# Altium PCB NearFieldProbeSet.PcbDoc (part 2 of 3)
Units mm, origin at the board's own origin, x right, y up, seen from the top; angles counter-clockwise.
Board outline 100 x 100 mm, 6 copper layers (Top Layer, Int1, Int2 (SIG), Int3, Int4, Bottom Layer), stack 1.538 mm thick; 8 components, 12 nets, 232 pads, 4318 vias.
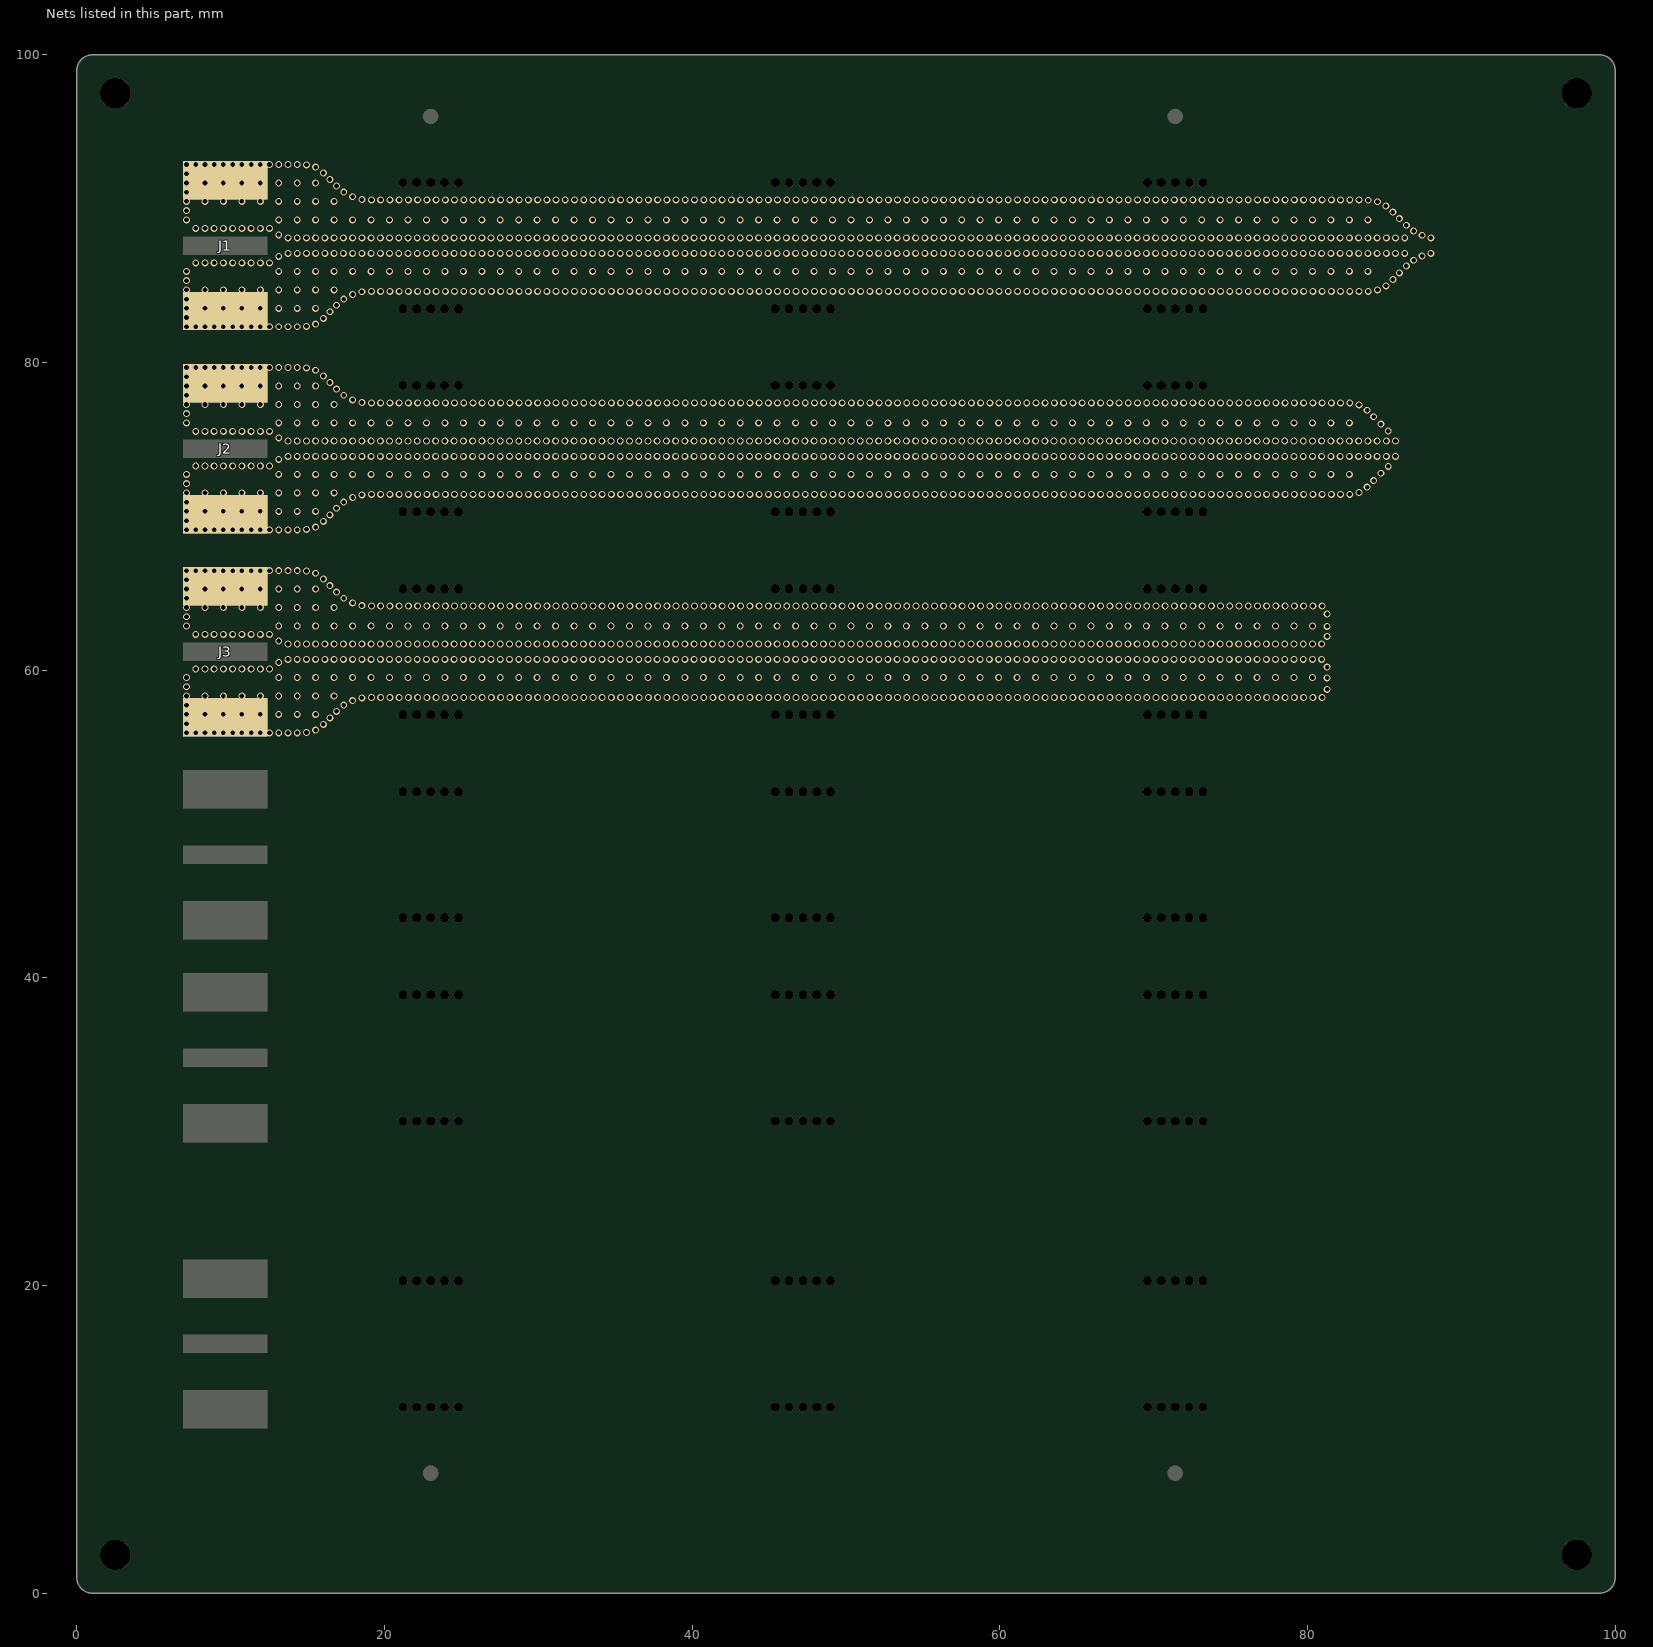
[diagram p6: the nets of this part, all layers, seen from the top]

## Via types
v1: diameter 0.45, hole 0.3, Top Layer to Bottom Layer, tented both sides, 4318 vias

## Nets (pads, with @x,y where several pads share a name; then routed paths per layer and width w, separated by ;. In a path a pad name is that pad's centre, name@x,y a point inside that pad or via, vN(x,y) a via of type N, cw(c..) or ccw(c..) an arc to the next point about the centre after c; other vN are vias at no path point)
GND1: J1.2 J1.3 J1.4 J1.5
  other v1: 7.125,82.325 7.725,82.325 8.325,82.325 8.925,82.325 9.525,82.325 10.125,82.325 10.725,82.325 11.325,82.325 11.925,82.325 12.525,82.325 13.125,82.325 13.725,82.325 14.325,82.325 14.925,82.35 15.525,82.5 16.025,82.875 7.125,82.925 16.45,83.3 7.125,83.525 8.325,83.525 9.525,83.525 10.725,83.525 11.925,83.525 13.125,83.525 14.325,83.525 15.525,83.525 16.875,83.725 7.125,84.125 17.35,84.125 17.925,84.425 18.525,84.6 19.15,84.625 19.75,84.625 20.35,84.625 20.95,84.625 21.55,84.625 22.15,84.625 22.75,84.625 23.35,84.625 23.95,84.625 24.55,84.625 25.15,84.625 25.75,84.625 26.35,84.625 26.95,84.625 27.55,84.625 28.15,84.625 28.75,84.625 29.35,84.625 29.95,84.625 30.55,84.625 31.15,84.625 31.75,84.625 32.35,84.625 32.95,84.625 33.55,84.625 34.15,84.625 34.75,84.625 35.35,84.625 35.95,84.625 36.55,84.625 37.15,84.625 37.75,84.625 38.35,84.625 38.95,84.625 39.55,84.625 40.15,84.625 40.75,84.625 41.35,84.625 41.95,84.625 42.55,84.625 43.15,84.625 43.75,84.625 44.35,84.625 44.95,84.625 45.55,84.625 46.15,84.625 46.75,84.625 47.35,84.625 47.95,84.625 48.55,84.625 49.15,84.625 49.75,84.625 50.35,84.625 50.95,84.625 51.55,84.625 52.15,84.625 52.75,84.625 53.35,84.625 53.95,84.625 54.55,84.625 55.15,84.625 55.75,84.625 56.35,84.625 56.95,84.625 57.55,84.625 58.15,84.625 58.75,84.625 59.35,84.625 59.95,84.625 60.55,84.625 61.15,84.625 61.75,84.625 62.35,84.625 62.95,84.625 63.55,84.625 64.15,84.625 64.75,84.625 65.35,84.625 65.95,84.625 66.55,84.625 67.15,84.625 67.75,84.625 68.35,84.625 68.95,84.625 69.55,84.625 70.15,84.625 70.75,84.625 71.35,84.625 71.95,84.625 72.55,84.625 73.15,84.625 73.75,84.625 74.35,84.625 74.95,84.625 75.55,84.625 76.15,84.625 76.75,84.625 77.35,84.625 77.95,84.625 78.55,84.625 79.15,84.625 79.75,84.625 80.35,84.625 80.95,84.625 81.55,84.625 82.15,84.625 82.75,84.625 83.35,84.625 83.95,84.625 7.125,84.725 8.325,84.725 9.525,84.725 10.725,84.725 11.925,84.725 13.125,84.725 14.325,84.725 15.525,84.725 16.725,84.725 84.55,84.725 85.105,84.98 7.125,85.325 85.55,85.4 85.975,85.825 7.125,85.925 13.125,85.925 14.325,85.925 15.525,85.925 16.725,85.925 17.925,85.925 19.125,85.925 20.325,85.925 21.525,85.925 22.725,85.925 23.925,85.925 25.125,85.925 26.325,85.925 27.525,85.925 28.725,85.925 29.925,85.925 31.125,85.925 32.325,85.925 33.525,85.925 34.725,85.925 35.925,85.925 37.125,85.925 38.325,85.925 39.525,85.925 40.725,85.925 41.925,85.925 43.125,85.925 44.325,85.925 45.525,85.925 46.725,85.925 47.925,85.925 49.125,85.925 50.325,85.925 51.525,85.925 52.725,85.925 53.925,85.925 55.125,85.925 56.325,85.925 57.525,85.925 58.725,85.925 59.925,85.925 61.125,85.925 62.325,85.925 63.525,85.925 64.725,85.925 65.925,85.925 67.125,85.925 68.325,85.925 69.525,85.925 70.725,85.925 71.925,85.925 73.125,85.925 74.325,85.925 75.525,85.925 76.725,85.925 77.925,85.925 79.125,85.925 80.325,85.925 81.525,85.925 82.725,85.925 83.925,85.925 86.425,86.275 7.725,86.475 8.325,86.475 8.925,86.475 9.525,86.475 10.125,86.475 10.725,86.475 11.325,86.475 11.925,86.475 12.525,86.475 86.9,86.65 13.125,86.9 87.45,86.925 13.725,87.1 14.325,87.1 14.925,87.1 15.525,87.1 16.125,87.1 16.725,87.1 17.325,87.1 17.925,87.1 18.525,87.1 19.125,87.1 19.725,87.1 20.325,87.1 20.925,87.1 21.525,87.1 22.125,87.1 22.725,87.1 23.325,87.1 23.925,87.1 24.525,87.1 25.125,87.1 25.725,87.1 26.325,87.1 26.925,87.1 27.525,87.1 28.125,87.1 28.725,87.1 29.325,87.1 29.925,87.1 30.525,87.1 31.125,87.1 31.725,87.1 32.325,87.1 32.925,87.1 33.525,87.1 34.125,87.1 34.725,87.1 35.325,87.1 35.925,87.1 36.525,87.1 37.125,87.1 37.725,87.1 38.325,87.1 38.925,87.1 39.525,87.1 40.125,87.1 40.725,87.1 41.325,87.1 41.925,87.1 42.525,87.1 43.125,87.1 43.725,87.1 44.325,87.1 44.925,87.1 45.525,87.1 46.125,87.1 46.725,87.1 47.325,87.1 47.925,87.1 48.525,87.1 49.125,87.1 49.725,87.1 50.325,87.1 50.925,87.1 51.525,87.1 52.125,87.1 52.725,87.1 53.325,87.1 53.925,87.1 54.525,87.1 55.125,87.1 55.725,87.1 56.325,87.1 56.925,87.1 57.525,87.1 58.125,87.1 58.725,87.1 59.325,87.1 59.925,87.1 60.525,87.1 61.125,87.1 61.725,87.1 62.325,87.1 62.925,87.1 63.525,87.1 64.125,87.1 64.725,87.1 65.325,87.1 65.925,87.1 66.525,87.1 67.125,87.1 67.725,87.1 68.325,87.1 68.925,87.1 69.525,87.1 70.125,87.1 70.725,87.1 71.325,87.1 71.925,87.1 72.525,87.1 73.125,87.1 73.725,87.1 74.325,87.1 74.925,87.1 75.525,87.1 76.125,87.1 76.725,87.1 77.325,87.1 77.925,87.1 78.525,87.1 79.125,87.1 79.725,87.1 80.325,87.1 80.925,87.1 81.525,87.1 82.125,87.1 82.725,87.1 83.325,87.1 83.925,87.1 84.525,87.1 85.125,87.1 85.725,87.1 86.325,87.1 88.025,87.1 13.725,88.1 14.325,88.1 14.925,88.1 15.525,88.1 16.125,88.1 16.725,88.1 17.325,88.1 17.925,88.1 18.525,88.1 19.125,88.1 19.725,88.1 20.325,88.1 20.925,88.1 21.525,88.1 22.125,88.1 22.725,88.1 23.325,88.1 23.925,88.1 24.525,88.1 25.125,88.1 25.725,88.1 26.325,88.1 26.925,88.1 27.525,88.1 28.125,88.1 28.725,88.1 29.325,88.1 29.925,88.1 30.525,88.1 31.125,88.1 31.725,88.1 32.325,88.1 32.925,88.1 33.525,88.1 34.125,88.1 34.725,88.1 35.325,88.1 35.925,88.1 36.525,88.1 37.125,88.1 37.725,88.1 38.325,88.1 38.925,88.1 39.525,88.1 40.125,88.1 40.725,88.1 41.325,88.1 41.925,88.1 42.525,88.1 43.125,88.1 43.725,88.1 44.325,88.1 44.925,88.1 45.525,88.1 46.125,88.1 46.725,88.1 47.325,88.1 47.925,88.1 48.525,88.1 49.125,88.1 49.725,88.1 50.325,88.1 50.925,88.1 51.525,88.1 52.125,88.1 52.725,88.1 53.325,88.1 53.925,88.1 54.525,88.1 55.125,88.1 55.725,88.1 56.325,88.1 56.925,88.1 57.525,88.1 58.125,88.1 58.725,88.1 59.325,88.1 59.925,88.1 60.525,88.1 61.125,88.1 61.725,88.1 62.325,88.1 62.925,88.1 63.525,88.1 64.125,88.1 64.725,88.1 65.325,88.1 65.925,88.1 66.525,88.1 67.125,88.1 67.725,88.1 68.325,88.1 68.925,88.1 69.525,88.1 70.125,88.1 70.725,88.1 71.325,88.1 71.925,88.1 72.525,88.1 73.125,88.1 73.725,88.1 74.325,88.1 74.925,88.1 75.525,88.1 76.125,88.1 76.725,88.1 77.325,88.1 77.925,88.1 78.525,88.1 79.125,88.1 79.725,88.1 80.325,88.1 80.925,88.1 81.525,88.1 82.125,88.1 82.725,88.1 83.325,88.1 83.925,88.1 84.525,88.1 85.125,88.1 85.725,88.1 86.325,88.1 88.025,88.1 87.45,88.275 13.125,88.3 86.9,88.55 7.725,88.725 8.325,88.725 8.925,88.725 9.525,88.725 10.125,88.725 10.725,88.725 11.325,88.725 11.925,88.725 12.525,88.725 86.425,88.925 7.125,89.275 13.125,89.275 14.325,89.275 15.525,89.275 16.725,89.275 17.925,89.275 19.125,89.275 20.325,89.275 21.525,89.275 22.725,89.275 23.925,89.275 25.125,89.275 26.325,89.275 27.525,89.275 28.725,89.275 29.925,89.275 31.125,89.275 32.325,89.275 33.525,89.275 34.725,89.275 35.925,89.275 37.125,89.275 38.325,89.275 39.525,89.275 40.725,89.275 41.925,89.275 43.125,89.275 44.325,89.275 45.525,89.275 46.725,89.275 47.925,89.275 49.125,89.275 50.325,89.275 51.525,89.275 52.725,89.275 53.925,89.275 55.125,89.275 56.325,89.275 57.525,89.275 58.725,89.275 59.925,89.275 61.125,89.275 62.325,89.275 63.525,89.275 64.725,89.275 65.925,89.275 67.125,89.275 68.325,89.275 69.525,89.275 70.725,89.275 71.925,89.275 73.125,89.275 74.325,89.275 75.525,89.275 76.725,89.275 77.925,89.275 79.125,89.275 80.325,89.275 81.525,89.275 82.725,89.275 83.925,89.275 85.975,89.35 85.55,89.775 7.125,89.875 85.1,90.175 84.55,90.45 7.125,90.475 8.325,90.475 9.525,90.475 10.725,90.475 11.925,90.475 13.125,90.475 14.325,90.475 15.525,90.475 16.725,90.475 83.95,90.55 19.15,90.575 19.75,90.575 20.35,90.575 20.95,90.575 21.55,90.575 22.15,90.575 22.75,90.575 23.35,90.575 23.95,90.575 24.55,90.575 25.15,90.575 25.75,90.575 26.35,90.575 26.95,90.575 27.55,90.575 28.15,90.575 28.75,90.575 29.35,90.575 29.95,90.575 30.55,90.575 31.15,90.575 31.75,90.575 32.35,90.575 32.95,90.575 33.55,90.575 34.15,90.575 34.75,90.575 35.35,90.575 35.95,90.575 36.55,90.575 37.15,90.575 37.75,90.575 38.35,90.575 38.95,90.575 39.55,90.575 40.15,90.575 40.75,90.575 41.35,90.575 41.95,90.575 42.55,90.575 43.15,90.575 43.75,90.575 44.35,90.575 44.95,90.575 45.55,90.575 46.15,90.575 46.75,90.575 47.35,90.575 47.95,90.575 48.55,90.575 49.15,90.575 49.75,90.575 50.35,90.575 50.95,90.575 51.55,90.575 52.15,90.575 52.75,90.575 53.35,90.575 53.95,90.575 54.55,90.575 55.15,90.575 55.75,90.575 56.35,90.575 56.95,90.575 57.55,90.575 58.15,90.575 58.75,90.575 59.35,90.575 59.95,90.575 60.55,90.575 61.15,90.575 61.75,90.575 62.35,90.575 62.95,90.575 63.55,90.575 64.15,90.575 64.75,90.575 65.35,90.575 65.95,90.575 66.55,90.575 67.15,90.575 67.75,90.575 68.35,90.575 68.95,90.575 69.55,90.575 70.15,90.575 70.75,90.575 71.35,90.575 71.95,90.575 72.55,90.575 73.15,90.575 73.75,90.575 74.35,90.575 74.95,90.575 75.55,90.575 76.15,90.575 76.75,90.575 77.35,90.575 77.95,90.575 78.55,90.575 79.15,90.575 79.75,90.575 80.35,90.575 80.95,90.575 81.55,90.575 82.15,90.575 82.75,90.575 83.35,90.575 18.525,90.6 17.925,90.775 7.125,91.075 17.35,91.075 16.875,91.475 7.125,91.675 8.325,91.675 9.525,91.675 10.725,91.675 11.925,91.675 13.125,91.675 14.325,91.675 15.525,91.675 16.45,91.9 7.125,92.275 16.025,92.325 15.525,92.7 14.925,92.85 7.125,92.875 7.725,92.875 8.325,92.875 8.925,92.875 9.525,92.875 10.125,92.875 10.725,92.875 11.325,92.875 11.925,92.875 12.525,92.875 13.125,92.875 13.725,92.875 14.325,92.875
GND2: J2.2 J2.3 J2.4 J2.5
  other v1: 7.125,69.125 7.725,69.125 8.325,69.125 8.925,69.125 9.525,69.125 10.125,69.125 10.725,69.125 11.325,69.125 11.925,69.125 12.525,69.125 13.125,69.125 13.725,69.125 14.325,69.125 14.925,69.15 15.525,69.3 16.025,69.675 7.125,69.725 16.45,70.1 7.125,70.325 8.325,70.325 9.525,70.325 10.725,70.325 11.925,70.325 13.125,70.325 14.325,70.325 15.525,70.325 16.875,70.525 7.125,70.925 17.35,70.925 17.925,71.225 18.525,71.4 19.15,71.425 19.75,71.425 20.35,71.425 20.95,71.425 21.55,71.425 22.15,71.425 22.75,71.425 23.35,71.425 23.95,71.425 24.55,71.425 25.15,71.425 25.75,71.425 26.35,71.425 26.95,71.425 27.55,71.425 28.15,71.425 28.75,71.425 29.35,71.425 29.95,71.425 30.55,71.425 31.15,71.425 31.75,71.425 32.35,71.425 32.95,71.425 33.55,71.425 34.15,71.425 34.75,71.425 35.35,71.425 35.95,71.425 36.55,71.425 37.15,71.425 37.75,71.425 38.35,71.425 38.95,71.425 39.55,71.425 40.15,71.425 40.75,71.425 41.35,71.425 41.95,71.425 42.55,71.425 43.15,71.425 43.75,71.425 44.35,71.425 44.95,71.425 45.55,71.425 46.15,71.425 46.75,71.425 47.35,71.425 47.95,71.425 48.55,71.425 49.15,71.425 49.75,71.425 50.35,71.425 50.95,71.425 51.55,71.425 52.15,71.425 52.75,71.425 53.35,71.425 53.95,71.425 54.55,71.425 55.15,71.425 55.75,71.425 56.35,71.425 56.95,71.425 57.55,71.425 58.15,71.425 58.75,71.425 59.35,71.425 59.95,71.425 60.55,71.425 61.15,71.425 61.75,71.425 62.35,71.425 62.95,71.425 63.55,71.425 64.15,71.425 64.75,71.425 65.35,71.425 65.95,71.425 66.55,71.425 67.15,71.425 67.75,71.425 68.35,71.425 68.95,71.425 69.55,71.425 70.15,71.425 70.75,71.425 71.35,71.425 71.95,71.425 72.55,71.425 73.15,71.425 73.75,71.425 74.35,71.425 74.95,71.425 75.55,71.425 76.15,71.425 76.75,71.425 77.35,71.425 77.95,71.425 78.55,71.425 79.15,71.425 79.75,71.425 80.35,71.425 80.95,71.425 81.55,71.425 82.15,71.425 82.75,71.425 7.125,71.525 8.325,71.525 9.525,71.525 10.725,71.525 11.925,71.525 13.125,71.525 14.325,71.525 15.525,71.525 16.725,71.525 83.35,71.55 83.875,71.9 7.125,72.125 84.3,72.325 7.125,72.725 13.125,72.725 14.325,72.725 15.525,72.725 16.725,72.725 17.925,72.725 19.125,72.725 20.325,72.725 21.525,72.725 22.725,72.725 23.925,72.725 25.125,72.725 26.325,72.725 27.525,72.725 28.725,72.725 29.925,72.725 31.125,72.725 32.325,72.725 33.525,72.725 34.725,72.725 35.925,72.725 37.125,72.725 38.325,72.725 39.525,72.725 40.725,72.725 41.925,72.725 43.125,72.725 44.325,72.725 45.525,72.725 46.725,72.725 47.925,72.725 49.125,72.725 50.325,72.725 51.525,72.725 52.725,72.725 53.925,72.725 55.125,72.725 56.325,72.725 57.525,72.725 58.725,72.725 59.925,72.725 61.125,72.725 62.325,72.725 63.525,72.725 64.725,72.725 65.925,72.725 67.125,72.725 68.325,72.725 69.525,72.725 70.725,72.725 71.925,72.725 73.125,72.725 74.325,72.725 75.525,72.725 76.725,72.725 77.925,72.725 79.125,72.725 80.325,72.725 81.525,72.725 82.725,72.725 84.775,72.8 85.25,73.25 7.725,73.275 8.325,73.275 8.925,73.275 9.525,73.275 10.125,73.275 10.725,73.275 11.325,73.275 11.925,73.275 12.525,73.275 13.125,73.7 13.725,73.9 14.325,73.9 14.925,73.9 15.525,73.9 16.125,73.9 16.725,73.9 17.325,73.9 17.925,73.9 18.525,73.9 19.125,73.9 19.725,73.9 20.325,73.9 20.925,73.9 21.525,73.9 22.125,73.9 22.725,73.9 23.325,73.9 23.925,73.9 24.525,73.9 25.125,73.9 25.725,73.9 26.325,73.9 26.925,73.9 27.525,73.9 28.125,73.9 28.725,73.9 29.325,73.9 29.925,73.9 30.525,73.9 31.125,73.9 31.725,73.9 32.325,73.9 32.925,73.9 33.525,73.9 34.125,73.9 34.725,73.9 35.325,73.9 35.925,73.9 36.525,73.9 37.125,73.9 37.725,73.9 38.325,73.9 38.925,73.9 39.525,73.9 40.125,73.9 40.725,73.9 41.325,73.9 41.925,73.9 42.525,73.9 43.125,73.9 43.725,73.9 44.325,73.9 44.925,73.9 45.525,73.9 46.125,73.9 46.725,73.9 47.325,73.9 47.925,73.9 48.525,73.9 49.125,73.9 49.725,73.9 50.325,73.9 50.925,73.9 51.525,73.9 52.125,73.9 52.725,73.9 53.325,73.9 53.925,73.9 54.525,73.9 55.125,73.9 55.725,73.9 56.325,73.9 56.925,73.9 57.525,73.9 58.125,73.9 58.725,73.9 59.325,73.9 59.925,73.9 60.525,73.9 61.125,73.9 61.725,73.9 62.325,73.9 62.925,73.9 63.525,73.9 64.125,73.9 64.725,73.9 65.325,73.9 65.925,73.9 66.525,73.9 67.125,73.9 67.725,73.9 68.325,73.9 68.925,73.9 69.525,73.9 70.125,73.9 70.725,73.9 71.325,73.9 71.925,73.9 72.525,73.9 73.125,73.9 73.725,73.9 74.325,73.9 74.925,73.9 75.525,73.9 76.125,73.9 76.725,73.9 77.325,73.9 77.925,73.9 78.525,73.9 79.125,73.9 79.725,73.9 80.325,73.9 80.925,73.9 81.525,73.9 82.125,73.9 82.725,73.9 83.325,73.9 83.925,73.9 84.525,73.9 85.125,73.9 85.725,73.9 13.725,74.9 14.325,74.9 14.925,74.9 15.525,74.9 16.125,74.9 16.725,74.9 17.325,74.9 17.925,74.9 18.525,74.9 19.125,74.9 19.725,74.9 20.325,74.9 20.925,74.9 21.525,74.9 22.125,74.9 22.725,74.9 23.325,74.9 23.925,74.9 24.525,74.9 25.125,74.9 25.725,74.9 26.325,74.9 26.925,74.9 27.525,74.9 28.125,74.9 28.725,74.9 29.325,74.9 29.925,74.9 30.525,74.9 31.125,74.9 31.725,74.9 32.325,74.9 32.925,74.9 33.525,74.9 34.125,74.9 34.725,74.9 35.325,74.9 35.925,74.9 36.525,74.9 37.125,74.9 37.725,74.9 38.325,74.9 38.925,74.9 39.525,74.9 40.125,74.9 40.725,74.9 41.325,74.9 41.925,74.9 42.525,74.9 43.125,74.9 43.725,74.9 44.325,74.9 44.925,74.9 45.525,74.9 46.125,74.9 46.725,74.9 47.325,74.9 47.925,74.9 48.525,74.9 49.125,74.9 49.725,74.9 50.325,74.9 50.925,74.9 51.525,74.9 52.125,74.9 52.725,74.9 53.325,74.9 53.925,74.9 54.525,74.9 55.125,74.9 55.725,74.9 56.325,74.9 56.925,74.9 57.525,74.9 58.125,74.9 58.725,74.9 59.325,74.9 59.925,74.9 60.525,74.9 61.125,74.9 61.725,74.9 62.325,74.9 62.925,74.9 63.525,74.9 64.125,74.9 64.725,74.9 65.325,74.9 65.925,74.9 66.525,74.9 67.125,74.9 67.725,74.9 68.325,74.9 68.925,74.9 69.525,74.9 70.125,74.9 70.725,74.9 71.325,74.9 71.925,74.9 72.525,74.9 73.125,74.9 73.725,74.9 74.325,74.9 74.925,74.9 75.525,74.9 76.125,74.9 76.725,74.9 77.325,74.9 77.925,74.9 78.525,74.9 79.125,74.9 79.725,74.9 80.325,74.9 80.925,74.9 81.525,74.9 82.125,74.9 82.725,74.9 83.325,74.9 83.925,74.9 84.525,74.9 85.125,74.9 85.725,74.9 13.125,75.1 7.725,75.525 8.325,75.525 8.925,75.525 9.525,75.525 10.125,75.525 10.725,75.525 11.325,75.525 11.925,75.525 12.525,75.525 85.25,75.55 84.775,76 7.125,76.075 13.125,76.075 14.325,76.075 15.525,76.075 16.725,76.075 17.925,76.075 19.125,76.075 20.325,76.075 21.525,76.075 22.725,76.075 23.925,76.075 25.125,76.075 26.325,76.075 27.525,76.075 28.725,76.075 29.925,76.075 31.125,76.075 32.325,76.075 33.525,76.075 34.725,76.075 35.925,76.075 37.125,76.075 38.325,76.075 39.525,76.075 40.725,76.075 41.925,76.075 43.125,76.075 44.325,76.075 45.525,76.075 46.725,76.075 47.925,76.075 49.125,76.075 50.325,76.075 51.525,76.075 52.725,76.075 53.925,76.075 55.125,76.075 56.325,76.075 57.525,76.075 58.725,76.075 59.925,76.075 61.125,76.075 62.325,76.075 63.525,76.075 64.725,76.075 65.925,76.075 67.125,76.075 68.325,76.075 69.525,76.075 70.725,76.075 71.925,76.075 73.125,76.075 74.325,76.075 75.525,76.075 76.725,76.075 77.925,76.075 79.125,76.075 80.325,76.075 81.525,76.075 82.725,76.075 84.3,76.475 7.125,76.675 83.875,76.9 83.35,77.25 7.125,77.275 8.325,77.275 9.525,77.275 10.725,77.275 11.925,77.275 13.125,77.275 14.325,77.275 15.525,77.275 16.725,77.275 19.15,77.375 19.75,77.375 20.35,77.375 20.95,77.375 21.55,77.375 22.15,77.375 22.75,77.375 23.35,77.375 23.95,77.375 24.55,77.375 25.15,77.375 25.75,77.375 26.35,77.375 26.95,77.375 27.55,77.375 28.15,77.375 28.75,77.375 29.35,77.375 29.95,77.375 30.55,77.375 31.15,77.375 31.75,77.375 32.35,77.375 32.95,77.375 33.55,77.375 34.15,77.375 34.75,77.375 35.35,77.375 35.95,77.375 36.55,77.375 37.15,77.375 37.75,77.375 38.35,77.375 38.95,77.375 39.55,77.375 40.15,77.375 40.75,77.375 41.35,77.375 41.95,77.375 42.55,77.375 43.15,77.375 43.75,77.375 44.35,77.375 44.95,77.375 45.55,77.375 46.15,77.375 46.75,77.375 47.35,77.375 47.95,77.375 48.55,77.375 49.15,77.375 49.75,77.375 50.35,77.375 50.95,77.375 51.55,77.375 52.15,77.375 52.75,77.375 53.35,77.375 53.95,77.375 54.55,77.375 55.15,77.375 55.75,77.375 56.35,77.375 56.95,77.375 57.55,77.375 58.15,77.375 58.75,77.375 59.35,77.375 59.95,77.375 60.55,77.375 61.15,77.375 61.75,77.375 62.35,77.375 62.95,77.375 63.55,77.375 64.15,77.375 64.75,77.375 65.35,77.375 65.95,77.375 66.55,77.375 67.15,77.375 67.75,77.375 68.35,77.375 68.95,77.375 69.55,77.375 70.15,77.375 70.75,77.375 71.35,77.375 71.95,77.375 72.55,77.375 73.15,77.375 73.75,77.375 74.35,77.375 74.95,77.375 75.55,77.375 76.15,77.375 76.75,77.375 77.35,77.375 77.95,77.375 78.55,77.375 79.15,77.375 79.75,77.375 80.35,77.375 80.95,77.375 81.55,77.375 82.15,77.375 82.75,77.375 18.525,77.4 17.925,77.575 7.125,77.875 17.35,77.875 16.875,78.275 7.125,78.475 8.325,78.475 9.525,78.475 10.725,78.475 11.925,78.475 13.125,78.475 14.325,78.475 15.525,78.475 16.45,78.7 7.125,79.075 16.025,79.125 15.525,79.5 14.925,79.65 7.125,79.675 7.725,79.675 8.325,79.675 8.925,79.675 9.525,79.675 10.125,79.675 10.725,79.675 11.325,79.675 11.925,79.675 12.525,79.675 13.125,79.675 13.725,79.675 14.325,79.675
GND3: J3.2 J3.3 J3.4 J3.5
  other v1: 7.125,55.925 7.725,55.925 8.325,55.925 8.925,55.925 9.525,55.925 10.125,55.925 10.725,55.925 11.325,55.925 11.925,55.925 12.525,55.925 13.125,55.925 13.725,55.925 14.325,55.925 14.925,55.95 15.525,56.1 16.025,56.475 7.125,56.525 16.45,56.9 7.125,57.125 8.325,57.125 9.525,57.125 10.725,57.125 11.925,57.125 13.125,57.125 14.325,57.125 15.525,57.125 16.875,57.325 7.125,57.725 17.35,57.725 17.925,58.025 18.525,58.2 19.15,58.225 19.75,58.225 20.35,58.225 20.95,58.225 21.55,58.225 22.15,58.225 22.75,58.225 23.35,58.225 23.95,58.225 24.55,58.225 25.15,58.225 25.75,58.225 26.35,58.225 26.95,58.225 27.55,58.225 28.15,58.225 28.75,58.225 29.35,58.225 29.95,58.225 30.55,58.225 31.15,58.225 31.75,58.225 32.35,58.225 32.95,58.225 33.55,58.225 34.15,58.225 34.75,58.225 35.35,58.225 35.95,58.225 36.55,58.225 37.15,58.225 37.75,58.225 38.35,58.225 38.95,58.225 39.55,58.225 40.15,58.225 40.75,58.225 41.35,58.225 41.95,58.225 42.55,58.225 43.15,58.225 43.75,58.225 44.35,58.225 44.95,58.225 45.55,58.225 46.15,58.225 46.75,58.225 47.35,58.225 47.95,58.225 48.55,58.225 49.15,58.225 49.75,58.225 50.35,58.225 50.95,58.225 51.55,58.225 52.15,58.225 52.75,58.225 53.35,58.225 53.95,58.225 54.55,58.225 55.15,58.225 55.75,58.225 56.35,58.225 56.95,58.225 57.55,58.225 58.15,58.225 58.75,58.225 59.35,58.225 59.95,58.225 60.55,58.225 61.15,58.225 61.75,58.225 62.35,58.225 62.95,58.225 63.55,58.225 64.15,58.225 64.75,58.225 65.35,58.225 65.95,58.225 66.55,58.225 67.15,58.225 67.75,58.225 68.35,58.225 68.95,58.225 69.55,58.225 70.15,58.225 70.75,58.225 71.35,58.225 71.95,58.225 72.55,58.225 73.15,58.225 73.75,58.225 74.35,58.225 74.95,58.225 75.55,58.225 76.15,58.225 76.75,58.225 77.35,58.225 77.95,58.225 78.55,58.225 79.15,58.225 79.75,58.225 80.35,58.225 80.95,58.225 7.125,58.325 8.325,58.325 9.525,58.325 10.725,58.325 11.925,58.325 13.125,58.325 14.325,58.325 15.525,58.325 16.725,58.325 81.275,58.75 7.125,58.925 81.275,59.5 7.125,59.525 13.125,59.525 14.325,59.525 15.525,59.525 16.725,59.525 17.925,59.525 19.125,59.525 20.325,59.525 21.525,59.525 22.725,59.525 23.925,59.525 25.125,59.525 26.325,59.525 27.525,59.525 28.725,59.525 29.925,59.525 31.125,59.525 32.325,59.525 33.525,59.525 34.725,59.525 35.925,59.525 37.125,59.525 38.325,59.525 39.525,59.525 40.725,59.525 41.925,59.525 43.125,59.525 44.325,59.525 45.525,59.525 46.725,59.525 47.925,59.525 49.125,59.525 50.325,59.525 51.525,59.525 52.725,59.525 53.925,59.525 55.125,59.525 56.325,59.525 57.525,59.525 58.725,59.525 59.925,59.525 61.125,59.525 62.325,59.525 63.525,59.525 64.725,59.525 65.925,59.525 67.125,59.525 68.325,59.525 69.525,59.525 70.725,59.525 71.925,59.525 73.125,59.525 74.325,59.525 75.525,59.525 76.725,59.525 77.925,59.525 79.125,59.525 80.325,59.525 7.725,60.075 8.325,60.075 8.925,60.075 9.525,60.075 10.125,60.075 10.725,60.075 11.325,60.075 11.925,60.075 12.525,60.075 81.275,60.2 13.125,60.5 13.725,60.7 14.325,60.7 14.925,60.7 15.525,60.7 16.125,60.7 16.725,60.7 17.325,60.7 17.925,60.7 18.525,60.7 19.125,60.7 19.725,60.7 20.325,60.7 20.925,60.7 21.525,60.7 22.125,60.7 22.725,60.7 23.325,60.7 23.925,60.7 24.525,60.7 25.125,60.7 25.725,60.7 26.325,60.7 26.925,60.7 27.525,60.7 28.125,60.7 28.725,60.7 29.325,60.7 29.925,60.7 30.525,60.7 31.125,60.7 31.725,60.7 32.325,60.7 32.925,60.7 33.525,60.7 34.125,60.7 34.725,60.7 35.325,60.7 35.925,60.7 36.525,60.7 37.125,60.7 37.725,60.7 38.325,60.7 38.925,60.7 39.525,60.7 40.125,60.7 40.725,60.7 41.325,60.7 41.925,60.7 42.525,60.7 43.125,60.7 43.725,60.7 44.325,60.7 44.925,60.7 45.525,60.7 46.125,60.7 46.725,60.7 47.325,60.7 47.925,60.7 48.525,60.7 49.125,60.7 49.725,60.7 50.325,60.7 50.925,60.7 51.525,60.7 52.125,60.7 52.725,60.7 53.325,60.7 53.925,60.7 54.525,60.7 55.125,60.7 55.725,60.7 56.325,60.7 56.925,60.7 57.525,60.7 58.125,60.7 58.725,60.7 59.325,60.7 59.925,60.7 60.525,60.7 61.125,60.7 61.725,60.7 62.325,60.7 62.925,60.7 63.525,60.7 64.125,60.7 64.725,60.7 65.325,60.7 65.925,60.7 66.525,60.7 67.125,60.7 67.725,60.7 68.325,60.7 68.925,60.7 69.525,60.7 70.125,60.7 70.725,60.7 71.325,60.7 71.925,60.7 72.525,60.7 73.125,60.7 73.725,60.7 74.325,60.7 74.925,60.7 75.525,60.7 76.125,60.7 76.725,60.7 77.325,60.7 77.925,60.7 78.525,60.7 79.125,60.7 79.725,60.7 80.325,60.7 80.925,60.7 13.725,61.7 14.325,61.7 14.925,61.7 15.525,61.7 16.125,61.7 16.725,61.7 17.325,61.7 17.925,61.7 18.525,61.7 19.125,61.7 19.725,61.7 20.325,61.7 20.925,61.7 21.525,61.7 22.125,61.7 22.725,61.7 23.325,61.7 23.925,61.7 24.525,61.7 25.125,61.7 25.725,61.7 26.325,61.7 26.925,61.7 27.525,61.7 28.125,61.7 28.725,61.7 29.325,61.7 29.925,61.7 30.525,61.7 31.125,61.7 31.725,61.7 32.325,61.7 32.925,61.7 33.525,61.7 34.125,61.7 34.725,61.7 35.325,61.7 35.925,61.7 36.525,61.7 37.125,61.7 37.725,61.7 38.325,61.7 38.925,61.7 39.525,61.7 40.125,61.7 40.725,61.7 41.325,61.7 41.925,61.7 42.525,61.7 43.125,61.7 43.725,61.7 44.325,61.7 44.925,61.7 45.525,61.7 46.125,61.7 46.725,61.7 47.325,61.7 47.925,61.7 48.525,61.7 49.125,61.7 49.725,61.7 50.325,61.7 50.925,61.7 51.525,61.7 52.125,61.7 52.725,61.7 53.325,61.7 53.925,61.7 54.525,61.7 55.125,61.7 55.725,61.7 56.325,61.7 56.925,61.7 57.525,61.7 58.125,61.7 58.725,61.7 59.325,61.7 59.925,61.7 60.525,61.7 61.125,61.7 61.725,61.7 62.325,61.7 62.925,61.7 63.525,61.7 64.125,61.7 64.725,61.7 65.325,61.7 65.925,61.7 66.525,61.7 67.125,61.7 67.725,61.7 68.325,61.7 68.925,61.7 69.525,61.7 70.125,61.7 70.725,61.7 71.325,61.7 71.925,61.7 72.525,61.7 73.125,61.7 73.725,61.7 74.325,61.7 74.925,61.7 75.525,61.7 76.125,61.7 76.725,61.7 77.325,61.7 77.925,61.7 78.525,61.7 79.125,61.7 79.725,61.7 80.325,61.7 80.925,61.7 13.125,61.9 81.275,62.2 7.725,62.325 8.325,62.325 8.925,62.325 9.525,62.325 10.125,62.325 10.725,62.325 11.325,62.325 11.925,62.325 12.525,62.325 81.275,62.85 7.125,62.875 13.125,62.875 14.325,62.875 15.525,62.875 16.725,62.875 17.925,62.875 19.125,62.875 20.325,62.875 21.525,62.875 22.725,62.875 23.925,62.875 25.125,62.875 26.325,62.875 27.525,62.875 28.725,62.875 29.925,62.875 31.125,62.875 32.325,62.875 33.525,62.875 34.725,62.875 35.925,62.875 37.125,62.875 38.325,62.875 39.525,62.875 40.725,62.875 41.925,62.875 43.125,62.875 44.325,62.875 45.525,62.875 46.725,62.875 47.925,62.875 49.125,62.875 50.325,62.875 51.525,62.875 52.725,62.875 53.925,62.875 55.125,62.875 56.325,62.875 57.525,62.875 58.725,62.875 59.925,62.875 61.125,62.875 62.325,62.875 63.525,62.875 64.725,62.875 65.925,62.875 67.125,62.875 68.325,62.875 69.525,62.875 70.725,62.875 71.925,62.875 73.125,62.875 74.325,62.875 75.525,62.875 76.725,62.875 77.925,62.875 79.125,62.875 80.325,62.875 7.125,63.475 81.275,63.65 7.125,64.075 8.325,64.075 9.525,64.075 10.725,64.075 11.925,64.075 13.125,64.075 14.325,64.075 15.525,64.075 16.725,64.075 19.15,64.175 19.75,64.175 20.35,64.175 20.95,64.175 21.55,64.175 22.15,64.175 22.75,64.175 23.35,64.175 23.95,64.175 24.55,64.175 25.15,64.175 25.75,64.175 26.35,64.175 26.95,64.175 27.55,64.175 28.15,64.175 28.75,64.175 29.35,64.175 29.95,64.175 30.55,64.175 31.15,64.175 31.75,64.175 32.35,64.175 32.95,64.175 33.55,64.175 34.15,64.175 34.75,64.175 35.35,64.175 35.95,64.175 36.55,64.175 37.15,64.175 37.75,64.175 38.35,64.175 38.95,64.175 39.55,64.175 40.15,64.175 40.75,64.175 41.35,64.175 41.95,64.175 42.55,64.175 43.15,64.175 43.75,64.175 44.35,64.175 44.95,64.175 45.55,64.175 46.15,64.175 46.75,64.175 47.35,64.175 47.95,64.175 48.55,64.175 49.15,64.175 49.75,64.175 50.35,64.175 50.95,64.175 51.55,64.175 52.15,64.175 52.75,64.175 53.35,64.175 53.95,64.175 54.55,64.175 55.15,64.175 55.75,64.175 56.35,64.175 56.95,64.175 57.55,64.175 58.15,64.175 58.75,64.175 59.35,64.175 59.95,64.175 60.55,64.175 61.15,64.175 61.75,64.175 62.35,64.175 62.95,64.175 63.55,64.175 64.15,64.175 64.75,64.175 65.35,64.175 65.95,64.175 66.55,64.175 67.15,64.175 67.75,64.175 68.35,64.175 68.95,64.175 69.55,64.175 70.15,64.175 70.75,64.175 71.35,64.175 71.95,64.175 72.55,64.175 73.15,64.175 73.75,64.175 74.35,64.175 74.95,64.175 75.55,64.175 76.15,64.175 76.75,64.175 77.35,64.175 77.95,64.175 78.55,64.175 79.15,64.175 79.75,64.175 80.35,64.175 80.95,64.175 18.525,64.2 17.925,64.375 7.125,64.675 17.35,64.675 16.875,65.075 7.125,65.275 8.325,65.275 9.525,65.275 10.725,65.275 11.925,65.275 13.125,65.275 14.325,65.275 15.525,65.275 16.45,65.5 7.125,65.875 16.025,65.925 15.525,66.3 14.925,66.45 7.125,66.475 7.725,66.475 8.325,66.475 8.925,66.475 9.525,66.475 10.125,66.475 10.725,66.475 11.325,66.475 11.925,66.475 12.525,66.475 13.125,66.475 13.725,66.475 14.325,66.475